# Altium PCB MEA_60_3MIL.PcbDoc
Units mm, origin at the board's own origin, x right, y up, seen from the top; angles counter-clockwise.
Board outline 49 x 49 mm, 4 copper layers (Top Copper Layer, Internal Copper Layer 1, Internal Copper Layer 2, Bottom Copper Layer), stack 1.58 mm thick; 1 components, 60 nets, 120 pads, 0 vias.
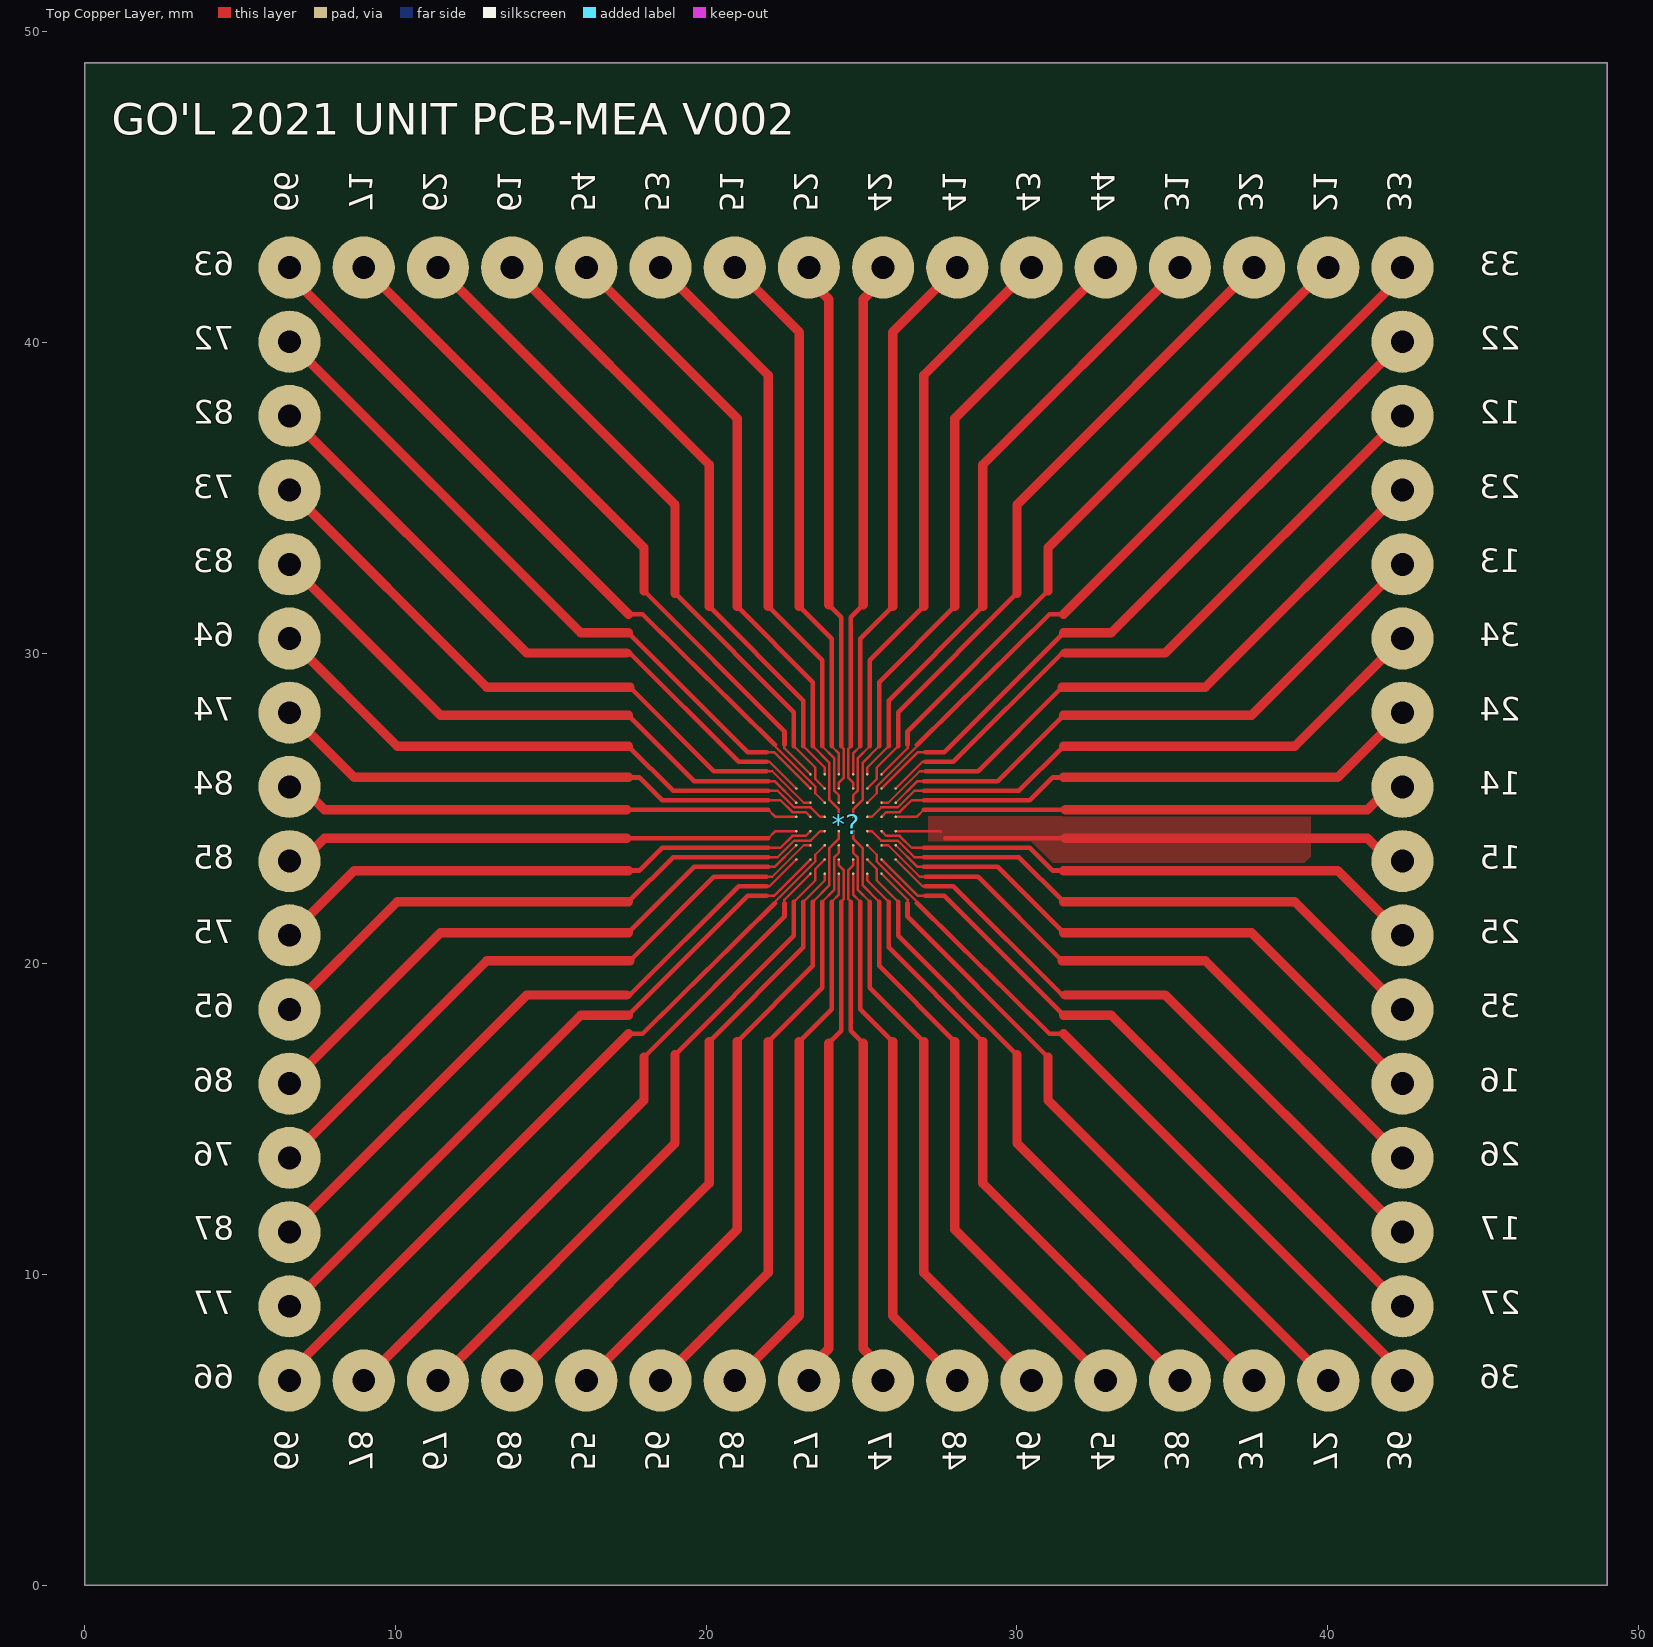
[diagram p0: Top Copper Layer view]
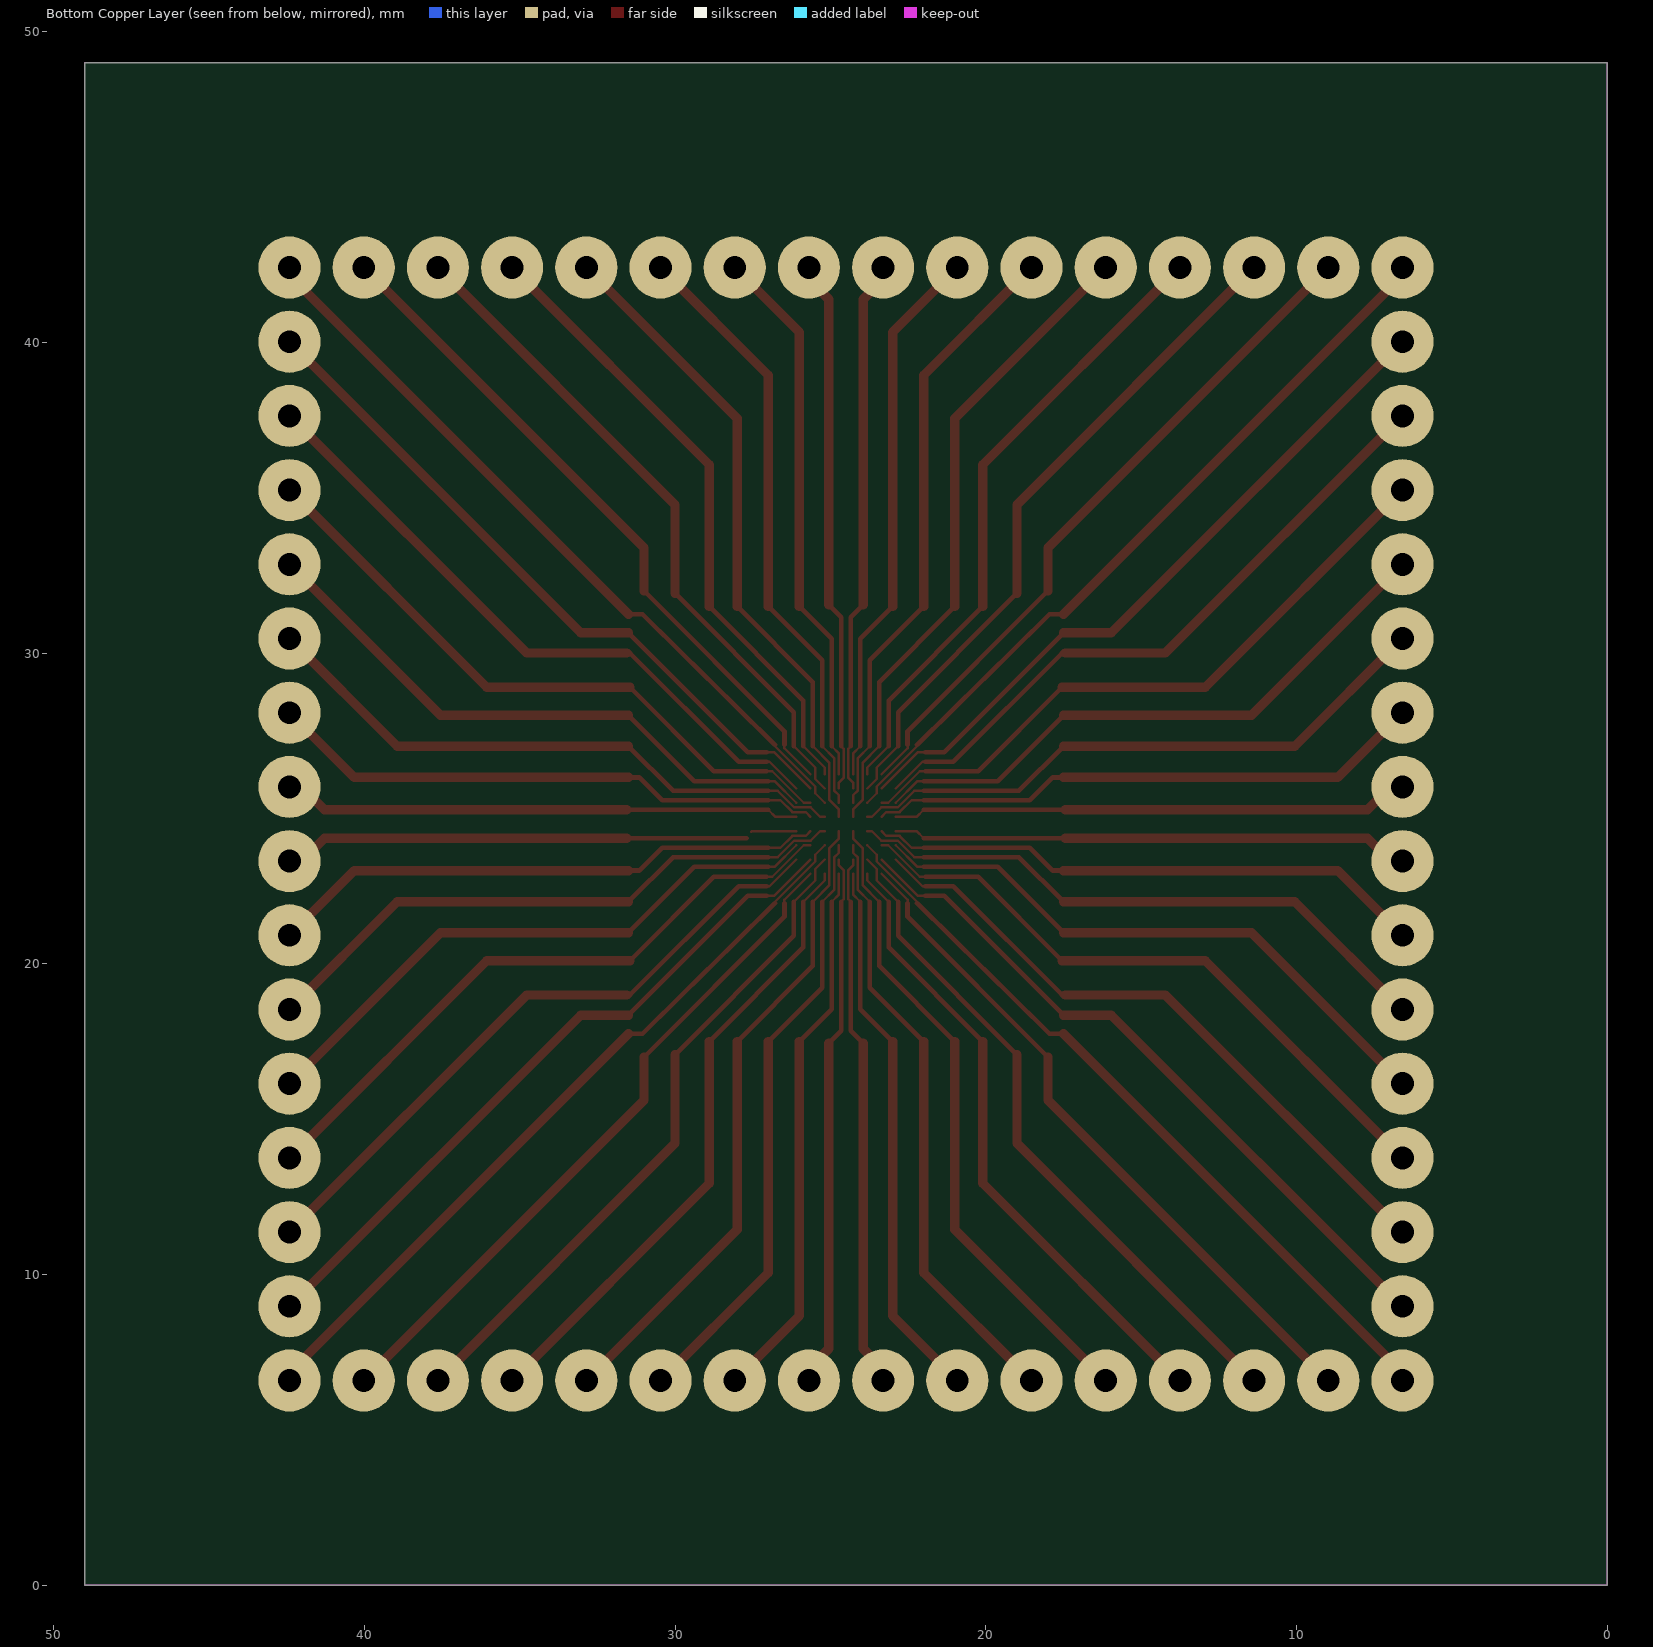
[diagram p1: Bottom Copper Layer view, seen from below]

## Layer stack, top to bottom
Top Solder: solder mask 0.01, Solder Resist, Dk 3.5
Top Copper Layer: signal copper 0.035
Dielectric 1: prepreg 0.22, FR-4, Dk 4.2
Internal Copper Layer 1: signal copper 0.035
Dielectric 2: core 1, FR-4, Dk 4.2
Internal Copper Layer 2: signal copper 0.035
Dielectric 3: prepreg 0.22, FR-4, Dk 4.2
Bottom Copper Layer: signal copper 0.035
Bottom Solder: solder mask 0.01, Solder Resist, Dk 3.5

## Board outline
49,0 49,49 0,49 0,0

## Design rules (kind name [scope] priority, off if disabled: settings)
BoardOutlineClearance [All] p1: gap=0.4 ignorepadtopadclearanceinfootprint=FALSE
Clearance [All] p1: gap=0.076 ignorepadtopadclearanceinfootprint=TRUE
ComponentClearance [All] p1: gap=0.15 collisioncheckmode=3 verticalgap=0.15 showdistances=FALSE
HoleSize [All] p1: absolutevalues=TRUE maxlimit=0.4 minlimit=0.25 maxpercent=80.000 minpercent=20.000
HoleToHoleClearance [All] p1: gap=0.45 allowstackedmicrovias=TRUE
MinimumAnnularRing [All] p1: minimumring=0.15
MinimumSolderMaskSliver [All] p1: minsoldermaskwidth=0.15
PlaneClearance [All] p1: clearance=0.15
PlaneConnect [All] p1: planeconnectstyle=Relief reliefexpansion=0.25 reliefentries=4 reliefconductorwidth=0.15 reliefairgap=0.15
PolygonConnect [All] p1: connectstyle=Direct reliefconductorwidth=0.15 reliefentries=4 polygonreliefangle="90 Angle" airgapwidth=0.15
RoomDefinition MEA_60_3MIL [InComponentClass('MEA_60_3MIL')] p1 off: confinementstyle=ConfineIn formatcopy=TRUE lockcomponents=FALSE outline 0,0 50.8,0 50.8,25.4 0,25.4
RoutingVias [All] p1: holewidth=0.25 width=0.55 viastyle="Through Hole" minholewidth=0.25 minwidth=0.55 maxholewidth=0.4 maxwidth=0.8
SilkToSilkClearance [All] p1: silktosilkclearance=0.2
SilkToSolderMaskClearance [IsPad] p1: minsilkscreentomaskgap=0.2 clearancetoexposedcopper=TRUE
SolderMaskExpansion [All] p1: expansion=0.15 istentingtop=FALSE
Width [All] p1: maxlimit=50 minlimit=0.076 preferedwidth=0.203
22 further rules are at their usual default settings.

## Components (designator, comment, footprint, x,y, rotation, side; value= is the part's Value field where it differs from the comment)
*? "POGO_PINS" MEA_3MIL_64 24.5,24.5 r180 top locked

## Footprints (in the part's own frame and the unit in brackets; to place one, negate y for a bottom-side part, rotate by r counter-clockwise, add the part's x,y. Pads: shape width x height; smd on the part's side, far side on the other; paste and mask are expansions set on the pad)
MEA_3MIL_64 [mil]
  round 78.74 hole 29 mask+5.91: 12(-705,-517) 13(-705,-329) 14(-705,-47) 15(-705,47) 16(-705,329) 17(-705,517) 21(-611,-705) 22(-705,-611) 23(-705,-423) 24(-705,-141) 25(-705,141) 26(-705,423) 27(-705,611) 28(-611,705) 31(-423,-705) 32(-517,-705) 33(-705,-705) 34(-705,-235) 35(-705,235) 36(-705,705) 37(-517,705) 38(-423,705) 41(-141,-705) 42(-47,-705) 43(-235,-705) 44(-329,-705) 45(-329,705) 46(-235,705) 47(-47,705) 48(-141,705) 51(141,-705) 52(47,-705) 53(235,-705) 54(329,-705) 55(329,705) 56(235,705) 57(47,705) 58(141,705) 61(423,-705) 62(517,-705) 63(705,-705) 64(705,-235) 65(705,235) 66(705,705) 67(517,705) 68(423,705) 71(611,-705) 72(705,-611) 73(705,-423) 74(705,-141) 75(705,141) 76(705,423) 77(705,611) 78(611,705) 82(705,-517) 83(705,-329) 84(705,-47) 85(705,47) 86(705,329) 87(705,517)
  round 3 smd mask+0: 12(-63,-45) 13(-63,-27) 14(-63,-9) 15(-63,9) 16(-63,27) 17(-63,45) 21(-45,-63) 22(-45,-45) 23(-45,-27) 24(-45,-9) 25(-45,9) 26(-45,27) 27(-45,45) 28(-45,63) 31(-27,-63) 32(-27,-45) 33(-27,-27) 34(-27,-9) 35(-27,9) 36(-27,27) 37(-27,45) 38(-27,63) 41(-9,-63) 42(-9,-45) 43(-9,-27) 44(-9,-9) 45(-9,9) 46(-9,27) 47(-9,45) 48(-9,63) 51(9,-63) 52(9,-45) 53(9,-27) 54(9,-9) 55(9,9) 56(9,27) 57(9,45) 58(9,63) 61(27,-63) 62(27,-45) 63(27,-27) 64(27,-9) 65(27,9) 66(27,27) 67(27,45) 68(27,63) 71(45,-63) 72(45,-45) 73(45,-27) 74(45,-9) 75(45,9) 76(45,27) 77(45,45) 78(45,63) 82(63,-45) 83(63,-27) 84(63,-9) 85(63,9) 86(63,27) 87(63,45)

## Nets (pads, with @x,y where several pads share a name; then routed paths per layer and width w, separated by ;. In a path a pad name is that pad's centre, name@x,y a point inside that pad or via, vN(x,y) a via of type N, cw(c..) or ccw(c..) an arc to the next point about the centre after c; other vN are vias at no path point)
E0: *?.72 | length 22.7
  Top Copper Layer w0.076: 21.95,26.805 22.195,26.805 *?.72@23.357,25.643
  Top Copper Layer w0.15: 17.5,30.65 21.345,26.805 21.95,26.805
  Top Copper Layer w0.3: *?.72@6.593,40.019 15.962,30.65 17.5,30.65
E1: *?.82 | length 21.3
  Top Copper Layer w0.076: 21.95,26.502 22.04,26.502 *?.82@22.9,25.643
  Top Copper Layer w0.15: 17.45,30 17.55,30 21.048,26.502 21.95,26.502
  Top Copper Layer w0.3: *?.82@6.593,37.632 14.225,30 17.45,30
E2: *?.73 | length 20.9
  Top Copper Layer w0.076: 21.941,26.2 22.127,26.2 23.141,25.186 *?.73@23.357,25.186
  Top Copper Layer w0.15: 17.55,28.9 20.25,26.2 21.941,26.2
  Top Copper Layer w0.3: *?.73@6.593,35.244 12.937,28.9 17.55,28.9
E3: *?.83 | length 19.5
  Top Copper Layer w0.076: 22,25.872 22.214,25.872 *?.83@22.9,25.186
  Top Copper Layer w0.152: 17.5,28 19.622,25.873 22,25.872
  Top Copper Layer w0.3: *?.83@6.593,32.857 11.45,28 17.5,28
E4: *?.64 | length 19.6
  Top Copper Layer w0.076: 22,25.567 22.303,25.567 22.837,25.033 23.367,25.033 23.671,24.729 *?.64@23.814,24.729
  Top Copper Layer w0.152: 17.5,27 18.933,25.567 22,25.567
  Top Copper Layer w0.3: *?.64@6.593,30.469 10.062,27 17.5,27
E5: *?.74 | length 18.2
  Top Copper Layer w0.076: 22,25.262 22.393,25.262 22.774,24.881 23.205,24.881 *?.74@23.357,24.729
  Top Copper Layer w0.152: 17.5,26 17.85,26 18.588,25.262 22,25.262
  Top Copper Layer w0.3: *?.74@6.593,28.081 8.674,26 17.5,26
E6: *?.84 | length 16.7
  Top Copper Layer w0.076: 22,24.956 22.227,24.729 *?.84@22.9,24.729
  Top Copper Layer w0.152: 17.444,24.956 22,24.956
  Top Copper Layer w0.3: *?.84@6.979,25.694 7.717,24.956 17.444,24.956
  Top Copper Layer w0.45: *?.84@6.593,25.694 *?.84@6.979,25.694
E7: *?.85 | length 16.7
  Top Copper Layer w0.076: 22,24.044 22.227,24.271 *?.85@22.9,24.271
  Top Copper Layer w0.152: 17.444,24.044 22,24.044
  Top Copper Layer w0.3: *?.85@6.979,23.306 7.717,24.044 17.444,24.044
  Top Copper Layer w0.45: *?.85@6.593,23.306 *?.85@6.979,23.306
E8: *?.75 | length 18.2
  Top Copper Layer w0.076: 22,23.738 22.393,23.738 22.774,24.119 23.205,24.119 *?.75@23.357,24.271
  Top Copper Layer w0.152: 17.5,23 17.85,23 18.588,23.738 22,23.738
  Top Copper Layer w0.3: *?.75@6.593,20.919 8.674,23 17.5,23
E9: *?.65 | length 19.6
  Top Copper Layer w0.076: 22,23.433 22.303,23.433 22.837,23.967 23.367,23.967 23.671,24.271 *?.65@23.814,24.271
  Top Copper Layer w0.152: 17.5,22 18.933,23.433 22,23.433
  Top Copper Layer w0.3: *?.65@6.593,18.531 10.062,22 17.5,22
E10: *?.86 | length 19.5
  Top Copper Layer w0.076: 22,23.128 22.214,23.128 *?.86@22.9,23.814
  Top Copper Layer w0.152: 17.5,21 19.622,23.127 22,23.128
  Top Copper Layer w0.3: *?.86@6.593,16.143 11.45,21 17.5,21
E11: *?.76 | length 20.9
  Top Copper Layer w0.076: 21.941,22.8 22.127,22.8 23.141,23.814 *?.76@23.357,23.814
  Top Copper Layer w0.15: 17.55,20.1 20.25,22.8 21.941,22.8
  Top Copper Layer w0.3: *?.76@6.593,13.756 12.937,20.1 17.55,20.1
E12: *?.87 | length 21.3
  Top Copper Layer w0.076: 21.95,22.498 22.04,22.498 *?.87@22.9,23.357
  Top Copper Layer w0.15: 17.45,19 17.55,19 21.048,22.498 21.95,22.498
  Top Copper Layer w0.3: *?.87@6.593,11.368 14.225,19 17.45,19
E13: *?.77 | length 22.7
  Top Copper Layer w0.076: 21.95,22.195 22.195,22.195 *?.77@23.357,23.357
  Top Copper Layer w0.15: 17.5,18.35 21.345,22.195 21.95,22.195
  Top Copper Layer w0.3: *?.77@6.593,8.981 15.962,18.35 17.5,18.35
E14: *?.66 | length 24.9
  Top Copper Layer w0.076: 22.214,21.95 22.214,21.998 23.509,23.294 23.509,23.509 *?.66@23.814,23.814
  Top Copper Layer w0.152: 17.5,17.75 17.952,17.75 22.214,21.95
  Top Copper Layer w0.3: *?.66@6.843,6.593 6.593,6.593 6.593,6.843 17.5,17.75
E15: *?.78 | length 22.3
  Top Copper Layer w0.076: 22.519,21.95 22.519,22.062 *?.78@23.357,22.9
  Top Copper Layer w0.15: 18,17 22.519,21.519 22.519,21.95
  Top Copper Layer w0.3: *?.78@8.981,6.593 18,15.612 18,17
E16: *?.67 | length 21.9
  Top Copper Layer w0.076: 22.824,22 23.509,22.686 23.509,23.052 *?.67@23.814,23.357
  Top Copper Layer w0.15: 19,17.076 22.824,20.9 22.824,22
  Top Copper Layer w0.3: *?.67@11.368,6.593 19,14.225 19,17.076
E17: *?.68 | length 20.5
  Top Copper Layer w0.076: 23.128,22 23.814,22.686 *?.68@23.814,22.9
  Top Copper Layer w0.15: 20.1,17.5 23.128,20.528 23.128,22
  Top Copper Layer w0.3: *?.68@13.756,6.593 20.1,12.937 20.1,17.5
E18: *?.55 | length 21
  Top Copper Layer w0.076: 23.433,22 23.967,22.533 23.967,23.725 24.271,24.03 *?.55@24.271,24.271
  Top Copper Layer w0.152: 21,17.5 23.433,19.933 23.433,22
  Top Copper Layer w0.3: *?.55@16.143,6.593 21,11.45 21,17.5
E19: *?.56 | length 19.6
  Top Copper Layer w0.076: 23.738,22 24.119,22.381 24.119,23.42 24.271,23.573 *?.56@24.271,23.814
  Top Copper Layer w0.152: 22,17.5 23.738,19.238 23.738,22
  Top Copper Layer w0.3: *?.56@18.531,6.593 22,10.062 22,17.5
E20: *?.58 | length 17.7
  Top Copper Layer w0.076: 24.043,22 24.271,22.229 *?.58@24.271,22.9
  Top Copper Layer w0.152: 23,17.5 24.043,18.543 24.043,22
  Top Copper Layer w0.3: *?.58@20.919,6.593 23,8.674 23,17.5
E21: *?.57 | length 17.3
  Top Copper Layer w0.076: *?.57@24.271,23.357 24.271,23.167 24.424,23.015 24.424,22.076 24.348,22
  Top Copper Layer w0.152: 23.95,17.45 24.348,17.848 24.348,22
  Top Copper Layer w0.3: *?.57@23.306,6.979 23.95,7.623 23.95,17.45
  Top Copper Layer w0.45: *?.57@23.306,6.593 *?.57@23.306,6.979
E22: *?.47 | length 17.3
  Top Copper Layer w0.076: 24.652,22 24.576,22.076 24.576,23.015 24.729,23.167 *?.47@24.729,23.357
  Top Copper Layer w0.152: 24.652,22 24.652,17.848 25.05,17.45
  Top Copper Layer w0.3: 25.05,17.45 25.05,7.623 *?.47@25.694,6.979
  Top Copper Layer w0.45: *?.47@25.694,6.593 *?.47@25.694,6.979
E23: *?.48 | length 17.7
  Top Copper Layer w0.076: *?.48@24.729,22.9 24.729,22.229 24.957,22
  Top Copper Layer w0.152: 24.957,22 24.957,18.543 26,17.5
  Top Copper Layer w0.3: 26,17.5 26,8.674 *?.48@28.081,6.593
E24: *?.46 | length 19.6
  Top Copper Layer w0.076: *?.46@24.729,23.814 24.729,23.573 24.881,23.42 24.881,22.381 25.262,22
  Top Copper Layer w0.152: 25.262,22 25.262,19.238 27,17.5
  Top Copper Layer w0.3: 27,17.5 27,10.062 *?.46@30.469,6.593
E25: *?.45 | length 21
  Top Copper Layer w0.076: *?.45@24.729,24.271 24.729,24.03 25.033,23.725 25.033,22.533 25.567,22
  Top Copper Layer w0.152: 25.567,22 25.567,19.933 28,17.5
  Top Copper Layer w0.3: 28,17.5 28,11.45 *?.45@32.857,6.593
E26: *?.38 | length 20.5
  Top Copper Layer w0.076: *?.38@25.186,22.9 25.186,22.686 25.872,22
  Top Copper Layer w0.15: 25.872,22 25.872,20.528 28.9,17.5
  Top Copper Layer w0.3: 28.9,17.5 28.9,12.937 *?.38@35.244,6.593
E27: *?.37 | length 21.9
  Top Copper Layer w0.076: *?.37@25.186,23.357 25.491,23.052 25.491,22.686 26.176,22
  Top Copper Layer w0.15: 26.176,22 26.176,20.9 30,17.076
  Top Copper Layer w0.3: 30,17.076 30,14.225 *?.37@37.632,6.593
E28: *?.28 | length 22.3
  Top Copper Layer w0.076: *?.28@25.643,22.9 26.481,22.062 26.481,21.95
  Top Copper Layer w0.15: 26.481,21.95 26.481,21.519 31,17
  Top Copper Layer w0.3: 31,17 31,15.612 *?.28@40.019,6.593
E29: *?.36 | length 24.9
  Top Copper Layer w0.076: *?.36@25.186,23.814 25.491,23.509 25.491,23.294 26.786,21.998 26.786,21.95
  Top Copper Layer w0.152: 26.786,21.95 31.048,17.75 31.5,17.75
  Top Copper Layer w0.3: 31.5,17.75 42.407,6.843 42.407,6.593 *?.36@42.157,6.593
E31: *?.27 | length 22.7
  Top Copper Layer w0.076: *?.27@25.643,23.357 26.805,22.195 27.05,22.195
  Top Copper Layer w0.15: 27.05,22.195 27.655,22.195 31.5,18.35
  Top Copper Layer w0.3: 31.5,18.35 33.038,18.35 *?.27@42.407,8.981
E32: *?.17 | length 21.3
  Top Copper Layer w0.076: *?.17@26.1,23.357 26.96,22.498 27.05,22.498
  Top Copper Layer w0.15: 27.05,22.498 27.952,22.498 31.45,19 31.55,19
  Top Copper Layer w0.3: 31.55,19 34.775,19 *?.17@42.407,11.368
E33: *?.26 | length 20.9
  Top Copper Layer w0.076: *?.26@25.643,23.814 25.859,23.814 26.873,22.8 27.059,22.8
  Top Copper Layer w0.15: 27.059,22.8 28.75,22.8 31.45,20.1
  Top Copper Layer w0.3: 31.45,20.1 36.063,20.1 *?.26@42.407,13.756
E34: *?.16 | length 19.5
  Top Copper Layer w0.076: *?.16@26.1,23.814 26.786,23.128 27,23.128
  Top Copper Layer w0.152: 27,23.128 29.378,23.127 31.5,21
  Top Copper Layer w0.3: 31.5,21 37.55,21 *?.16@42.407,16.143
E35: *?.35 | length 19.6
  Top Copper Layer w0.076: *?.35@25.186,24.271 25.329,24.271 25.633,23.967 26.163,23.967 26.697,23.433 27,23.433
  Top Copper Layer w0.152: 27,23.433 30.067,23.433 31.5,22
  Top Copper Layer w0.3: 31.5,22 38.938,22 *?.35@42.407,18.531
E36: *?.25 | length 18.2
  Top Copper Layer w0.076: *?.25@25.643,24.271 25.795,24.119 26.226,24.119 26.607,23.738 27,23.738
  Top Copper Layer w0.152: 27,23.738 30.412,23.738 31.15,23 31.5,23
  Top Copper Layer w0.3: 31.5,23 40.326,23 *?.25@42.407,20.919
E37: *?.15 | length 16.5
  Top Copper Layer w0.076: *?.15@26.1,24.271 27.529,24.271 27.55,24.25
  Top Copper Layer w0.152: 27.702,24.044 31.556,24.044
  Top Copper Layer w0.3: 31.556,24.044 41.283,24.044 *?.15@42.021,23.306
  Top Copper Layer w0.45: *?.15@42.021,23.306 *?.15@42.407,23.306
E38: *?.14 | length 16.7
  Top Copper Layer w0.076: *?.14@26.1,24.729 26.773,24.729 27,24.956
  Top Copper Layer w0.152: 27,24.956 31.556,24.956
  Top Copper Layer w0.3: 31.556,24.956 41.283,24.956 *?.14@42.021,25.694
  Top Copper Layer w0.45: *?.14@42.021,25.694 *?.14@42.407,25.694
E39: *?.24 | length 18.2
  Top Copper Layer w0.076: *?.24@25.643,24.729 25.795,24.881 26.226,24.881 26.607,25.262 27,25.262
  Top Copper Layer w0.152: 27,25.262 30.412,25.262 31.15,26 31.5,26
  Top Copper Layer w0.3: 31.5,26 40.326,26 *?.24@42.407,28.081
E40: *?.34 | length 19.6
  Top Copper Layer w0.076: *?.34@25.186,24.729 25.329,24.729 25.633,25.033 26.163,25.033 26.697,25.567 27,25.567
  Top Copper Layer w0.152: 27,25.567 30.067,25.567 31.5,27
  Top Copper Layer w0.3: 31.5,27 38.938,27 *?.34@42.407,30.469
E41: *?.13 | length 19.5
  Top Copper Layer w0.076: *?.13@26.1,25.186 26.786,25.872 27,25.872
  Top Copper Layer w0.152: 27,25.872 29.378,25.873 31.5,28
  Top Copper Layer w0.3: 31.5,28 37.55,28 *?.13@42.407,32.857
E42: *?.23 | length 20.9
  Top Copper Layer w0.076: *?.23@25.643,25.186 25.859,25.186 26.873,26.2 27.059,26.2
  Top Copper Layer w0.15: 27.059,26.2 28.75,26.2 31.45,28.9
  Top Copper Layer w0.3: 31.45,28.9 36.063,28.9 *?.23@42.407,35.244
E43: *?.12 | length 21.3
  Top Copper Layer w0.076: *?.12@26.1,25.643 26.96,26.502 27.05,26.502
  Top Copper Layer w0.15: 27.05,26.502 27.952,26.502 31.45,30 31.55,30
  Top Copper Layer w0.3: 31.55,30 34.775,30 *?.12@42.407,37.632
E44: *?.22 | length 22.7
  Top Copper Layer w0.076: *?.22@25.643,25.643 26.805,26.805 27.05,26.805
  Top Copper Layer w0.15: 27.05,26.805 27.655,26.805 31.5,30.65
  Top Copper Layer w0.3: 31.5,30.65 33.038,30.65 *?.22@42.407,40.019
E45: *?.33 | length 24.9
  Top Copper Layer w0.076: *?.33@25.186,25.186 25.491,25.491 25.491,25.706 26.786,27.002 26.786,27.05
  Top Copper Layer w0.152: 26.786,27.05 31.048,31.25 31.5,31.25
  Top Copper Layer w0.3: 31.5,31.25 42.407,42.157 42.407,42.407 *?.33@42.157,42.407
E46: *?.21 | length 22.3
  Top Copper Layer w0.076: *?.21@25.643,26.1 26.481,26.938 26.481,27.05
  Top Copper Layer w0.15: 26.481,27.05 26.481,27.481 31,32
  Top Copper Layer w0.3: 31,32 31,33.388 *?.21@40.019,42.407
E47: *?.32 | length 21.9
  Top Copper Layer w0.076: *?.32@25.186,25.643 25.491,25.948 25.491,26.314 26.176,27
  Top Copper Layer w0.15: 26.176,27 26.176,28.1 30,31.924
  Top Copper Layer w0.3: 30,31.924 30,34.775 *?.32@37.632,42.407
E48: *?.31 | length 20.5
  Top Copper Layer w0.076: *?.31@25.186,26.1 25.186,26.314 25.872,27
  Top Copper Layer w0.15: 25.872,27 25.872,28.472 28.9,31.5
  Top Copper Layer w0.3: 28.9,31.5 28.9,36.063 *?.31@35.244,42.407
E49: *?.44 | length 21
  Top Copper Layer w0.076: *?.44@24.729,24.729 24.729,24.97 25.033,25.275 25.033,26.467 25.567,27
  Top Copper Layer w0.152: 25.567,27 25.567,29.067 28,31.5
  Top Copper Layer w0.3: 28,31.5 28,37.55 *?.44@32.857,42.407
E50: *?.43 | length 19.6
  Top Copper Layer w0.076: *?.43@24.729,25.186 24.729,25.427 24.881,25.58 24.881,26.619 25.262,27
  Top Copper Layer w0.152: 25.262,27 25.262,29.762 27,31.5
  Top Copper Layer w0.3: 27,31.5 27,38.938 *?.43@30.469,42.407
E51: *?.41 | length 17.7
  Top Copper Layer w0.076: *?.41@24.729,26.1 24.729,26.771 24.957,27
  Top Copper Layer w0.152: 24.957,27 24.957,30.457 26,31.5
  Top Copper Layer w0.3: 26,31.5 26,40.326 *?.41@28.081,42.407
E52: *?.42 | length 17.3
  Top Copper Layer w0.076: 24.652,27 24.576,26.924 24.576,25.985 24.729,25.833 *?.42@24.729,25.643
  Top Copper Layer w0.152: 24.652,27 24.652,31.152 25.05,31.55
  Top Copper Layer w0.3: 25.05,31.55 25.05,41.377 *?.42@25.694,42.021
  Top Copper Layer w0.45: *?.42@25.694,42.021 *?.42@25.694,42.407
E53: *?.52 | length 17.3
  Top Copper Layer w0.076: *?.52@24.271,25.643 24.271,25.833 24.424,25.985 24.424,26.924 24.348,27
  Top Copper Layer w0.152: 23.95,31.55 24.348,31.152 24.348,27
  Top Copper Layer w0.3: *?.52@23.306,42.021 23.95,41.377 23.95,31.55
  Top Copper Layer w0.45: *?.52@23.306,42.021 *?.52@23.306,42.407
E54: *?.51 | length 17.7
  Top Copper Layer w0.076: 24.043,27 24.271,26.771 *?.51@24.271,26.1
  Top Copper Layer w0.152: 23,31.5 24.043,30.457 24.043,27
  Top Copper Layer w0.3: *?.51@20.919,42.407 23,40.326 23,31.5
E55: *?.53 | length 19.6
  Top Copper Layer w0.076: 23.738,27 24.119,26.619 24.119,25.58 24.271,25.427 *?.53@24.271,25.186
  Top Copper Layer w0.152: 22,31.5 23.738,29.762 23.738,27
  Top Copper Layer w0.3: *?.53@18.531,42.407 22,38.938 22,31.5
E56: *?.54 | length 21
  Top Copper Layer w0.076: 23.433,27 23.967,26.467 23.967,25.275 24.271,24.97 *?.54@24.271,24.729
  Top Copper Layer w0.152: 21,31.5 23.433,29.067 23.433,27
  Top Copper Layer w0.3: *?.54@16.143,42.407 21,37.55 21,31.5
E57: *?.61 | length 20.5
  Top Copper Layer w0.076: 23.128,27 23.814,26.314 *?.61@23.814,26.1
  Top Copper Layer w0.15: 20.1,31.5 23.128,28.472 23.128,27
  Top Copper Layer w0.3: *?.61@13.756,42.407 20.1,36.063 20.1,31.5
E58: *?.62 | length 21.9
  Top Copper Layer w0.076: 22.824,27 23.509,26.314 23.509,25.948 *?.62@23.814,25.643
  Top Copper Layer w0.15: 19,31.924 22.824,28.1 22.824,27
  Top Copper Layer w0.3: *?.62@11.368,42.407 19,34.775 19,31.924
E59: *?.71 | length 22.3
  Top Copper Layer w0.076: 22.519,27.05 22.519,26.938 *?.71@23.357,26.1
  Top Copper Layer w0.15: 18,32 22.519,27.481 22.519,27.05
  Top Copper Layer w0.3: *?.71@8.981,42.407 18,33.388 18,32
E60: *?.63 | length 24.9
  Top Copper Layer w0.076: 22.214,27.05 22.214,27.002 23.509,25.706 23.509,25.491 *?.63@23.814,25.186
  Top Copper Layer w0.152: 17.5,31.25 17.952,31.25 22.214,27.05
  Top Copper Layer w0.3: *?.63@6.843,42.407 6.593,42.407 6.593,42.157 17.5,31.25

## Polygon pours and split planes (outlines as drawn)
E37 on Top Solder "E37_L01_P000" (solid, remove dead copper, pour order 0): 39.25,23.25 39.45,23.45 39.45,24.75 27.15,24.75 27.15,23.95 30.45,23.95 31.15,23.25
E37 on Top Solder "E37_L01_P001" (solid, pour order 1): 39.25,23.25 39.45,23.45 39.45,24.75 27.15,24.75 27.15,23.95 30.45,23.95 31.15,23.25
E37 on Top Copper Layer "E37_L01_P002" (solid, remove dead copper, pour order 2): 39.25,23.25 39.45,23.45 39.45,24.75 27.15,24.75 27.15,23.95 30.45,23.95 31.15,23.25

## Keep-outs
Keep-Out Layer:
  the board outline again, w0.001

## Silkscreen, mask and mechanical layers (free items; w line width, h text height)
Top Overlay:
  text "GO'L 2021 UNIT PCB-MEA V002" at 0.877,46.677 h1.02

## Text inside footprints (layer, text, board x,y; h text height)
*?: Top Overlay "33" at 46.217,42.153 h0.76; Top Overlay "22" at 46.217,39.765 h0.76; Top Overlay "12" at 46.217,37.378 h0.76; Top Overlay "23" at 46.217,34.99 h0.76; Top Overlay "13" at 46.217,32.603 h0.76; Top Overlay "34" at 46.217,30.215 h0.76; Top Overlay "24" at 46.217,27.827 h0.76; Top Overlay "14" at 46.217,25.44 h0.76; Top Overlay "15" at 46.217,23.052 h0.76; Top Overlay "25" at 46.217,20.665 h0.76; Top Overlay "35" at 46.217,18.277 h0.76; Top Overlay "16" at 46.217,15.889 h0.76; Top Overlay "26" at 46.217,13.502 h0.76; Top Overlay "17" at 46.217,11.114 h0.76; Top Overlay "27" at 46.217,8.727 h0.76; Top Overlay "36" at 46.217,6.339 h0.76; Top Overlay "63" at 4.815,42.153 h0.76; Top Overlay "72" at 4.815,39.765 h0.76; Top Overlay "82" at 4.815,37.378 h0.76; Top Overlay "73" at 4.815,34.99 h0.76; Top Overlay "83" at 4.815,32.603 h0.76; Top Overlay "64" at 4.815,30.215 h0.76; Top Overlay "74" at 4.815,27.827 h0.76; Top Overlay "84" at 4.815,25.44 h0.76; Top Overlay "85" at 4.815,23.052 h0.76; Top Overlay "75" at 4.815,20.665 h0.76; Top Overlay "65" at 4.815,18.277 h0.76; Top Overlay "86" at 4.815,15.889 h0.76; Top Overlay "76" at 4.815,13.502 h0.76; Top Overlay "87" at 4.815,11.114 h0.76; Top Overlay "77" at 4.815,8.727 h0.76; Top Overlay "66" at 4.815,6.339 h0.76; Top Overlay "36" at 41.937,3.668 h0.76 r270; Top Overlay "72" at 39.549,3.668 h0.76 r270; Top Overlay "37" at 37.162,3.668 h0.76 r270; Top Overlay "38" at 34.774,3.668 h0.76 r270; Top Overlay "45" at 32.387,3.668 h0.76 r270; Top Overlay "46" at 29.999,3.668 h0.76 r270; Top Overlay "48" at 27.611,3.668 h0.76 r270; Top Overlay "47" at 25.224,3.668 h0.76 r270; Top Overlay "57" at 22.836,3.668 h0.76 r270; Top Overlay "58" at 20.449,3.668 h0.76 r270; Top Overlay "56" at 18.061,3.668 h0.76 r270; Top Overlay "55" at 15.674,3.668 h0.76 r270; Top Overlay "68" at 13.286,3.668 h0.76 r270; Top Overlay "67" at 10.898,3.668 h0.76 r270; Top Overlay "78" at 8.511,3.668 h0.76 r270; Top Overlay "66" at 6.123,3.668 h0.76 r270; Top Overlay "33" at 41.937,44.181 h0.76 r270; Top Overlay "21" at 39.55,44.181 h0.76 r270; Top Overlay "32" at 37.162,44.181 h0.76 r270; Top Overlay "31" at 34.774,44.181 h0.76 r270; Top Overlay "44" at 32.387,44.181 h0.76 r270; Top Overlay "43" at 29.999,44.181 h0.76 r270; Top Overlay "41" at 27.612,44.181 h0.76 r270; Top Overlay "42" at 25.224,44.181 h0.76 r270; Top Overlay "52" at 22.836,44.181 h0.76 r270; Top Overlay "51" at 20.449,44.181 h0.76 r270; Top Overlay "53" at 18.061,44.181 h0.76 r270; Top Overlay "54" at 15.674,44.181 h0.76 r270; Top Overlay "61" at 13.286,44.181 h0.76 r270; Top Overlay "62" at 10.898,44.181 h0.76 r270; Top Overlay "71" at 8.511,44.181 h0.76 r270; Top Overlay "66" at 6.123,44.181 h0.76 r270